# Altium PCB Rear_Tail_Lights_FULL.PcbDoc
Units mil, origin at the board's own origin, x right, y up, seen from the top; angles counter-clockwise.
Board outline 5500 x 5500 mil, 2 copper layers (Top Layer, Bottom Layer), stack 61.811 mil thick; 72 components, 63 nets, 150 pads, 406 vias.
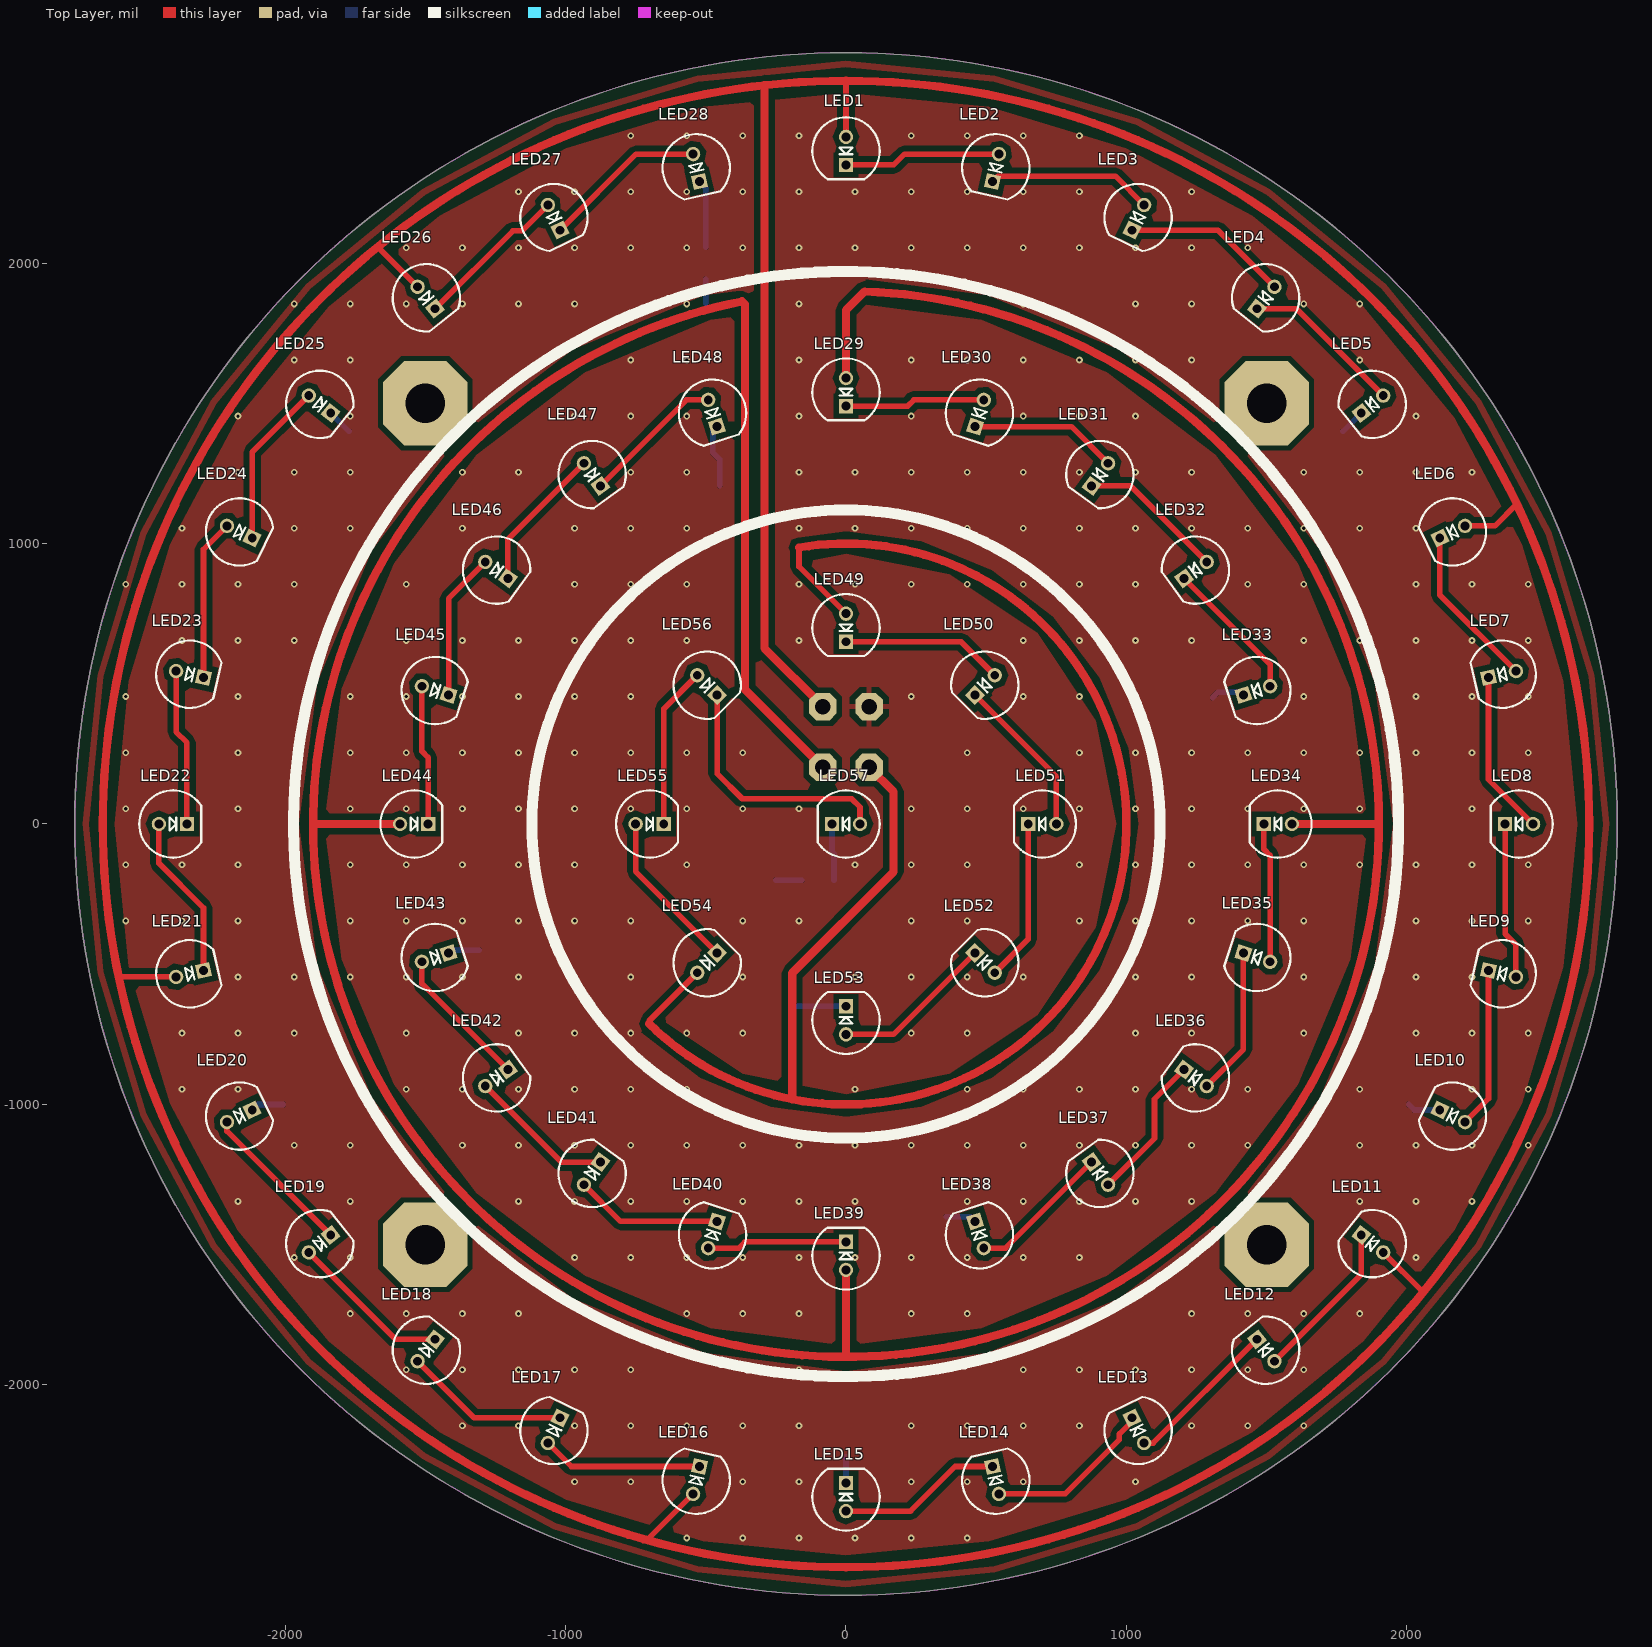
[diagram p0: Top Layer view]
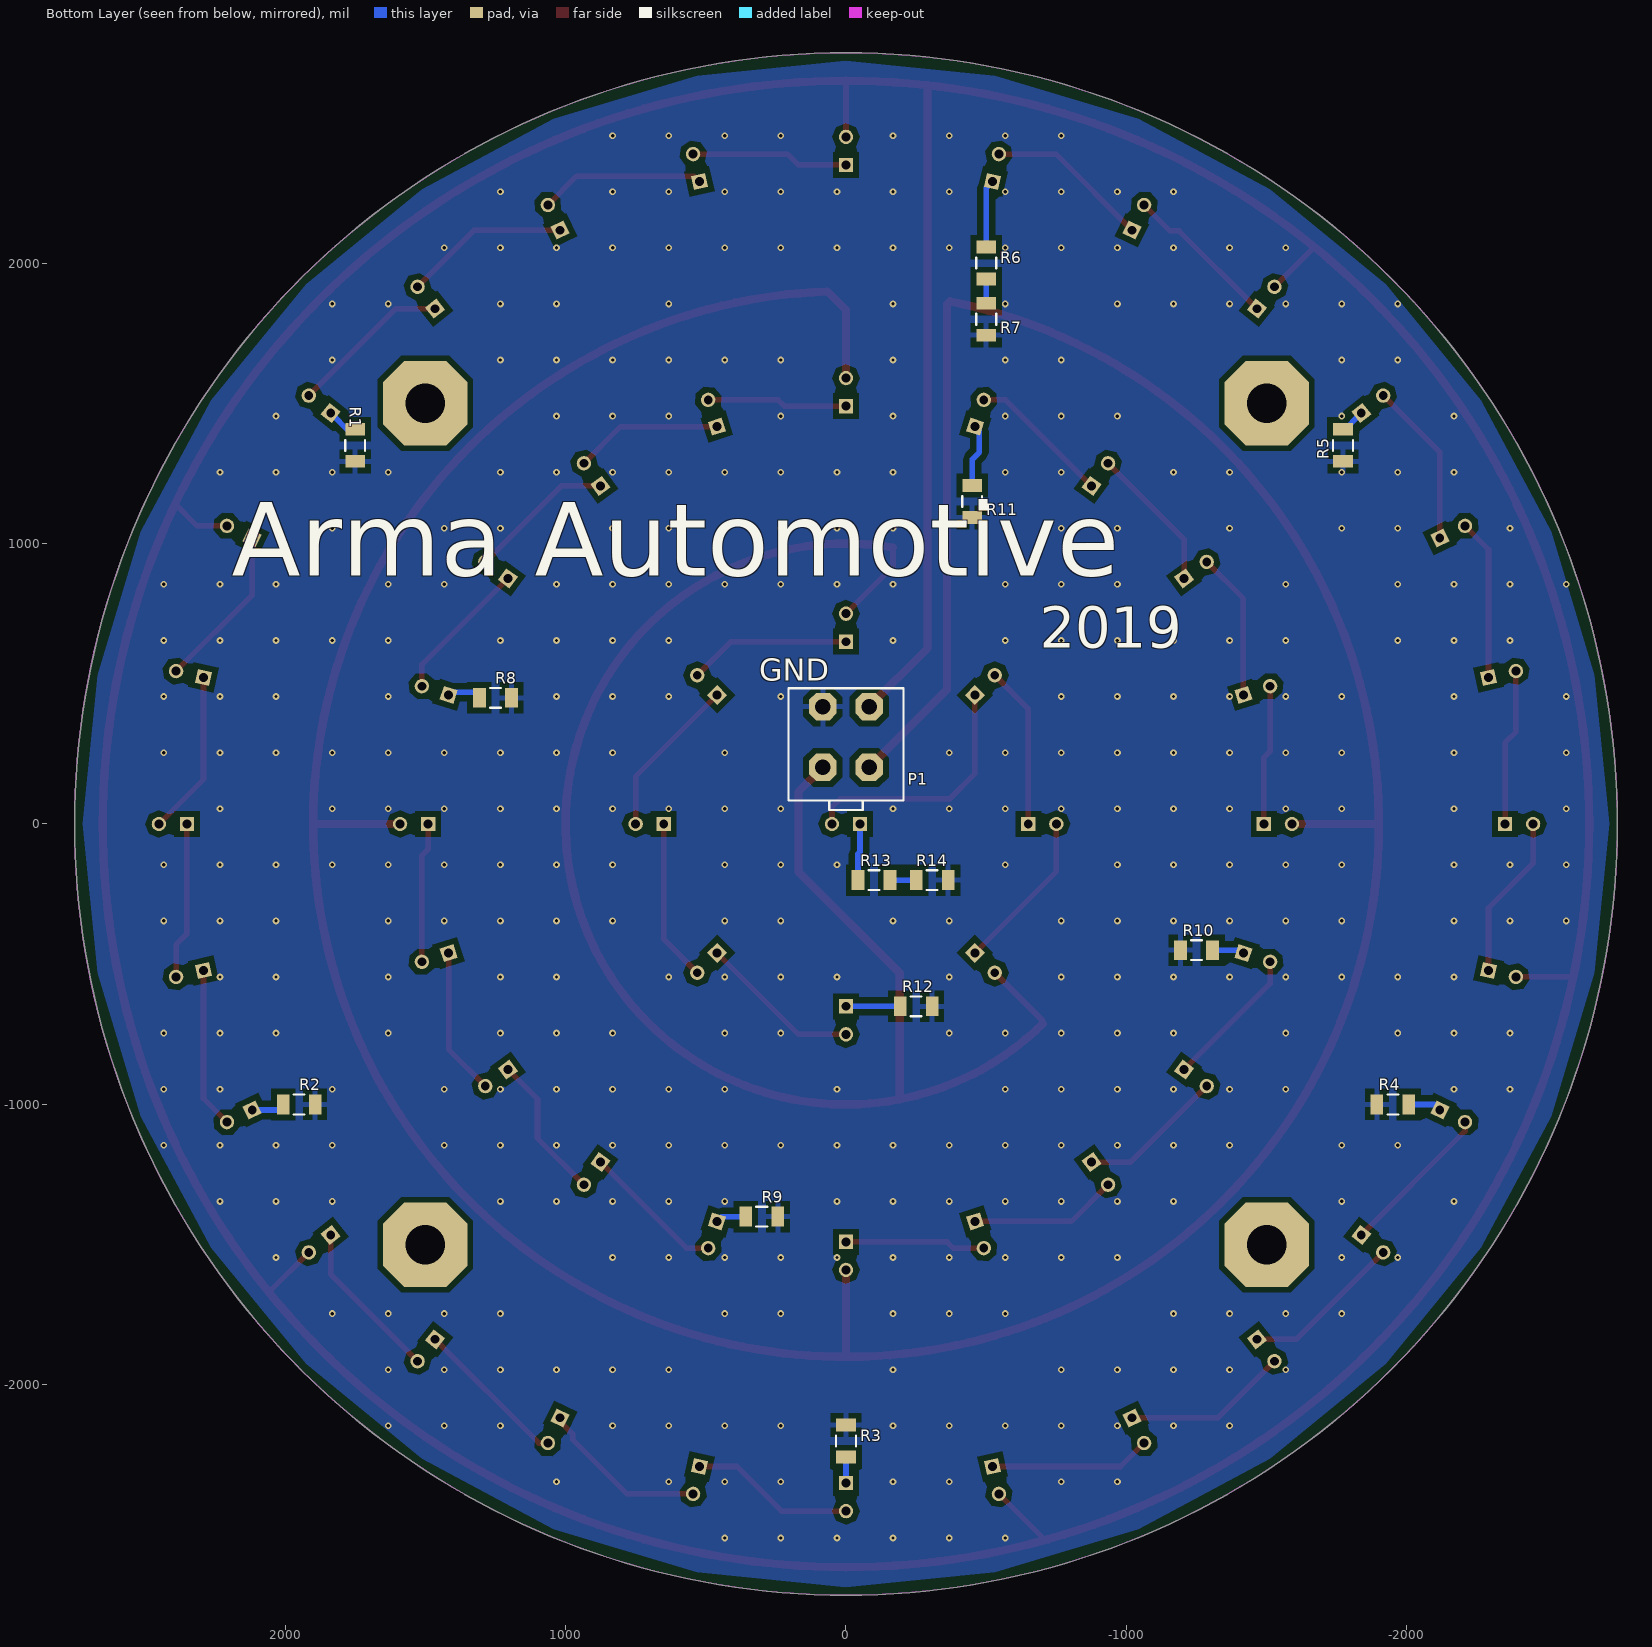
[diagram p1: Bottom Layer view, seen from below]
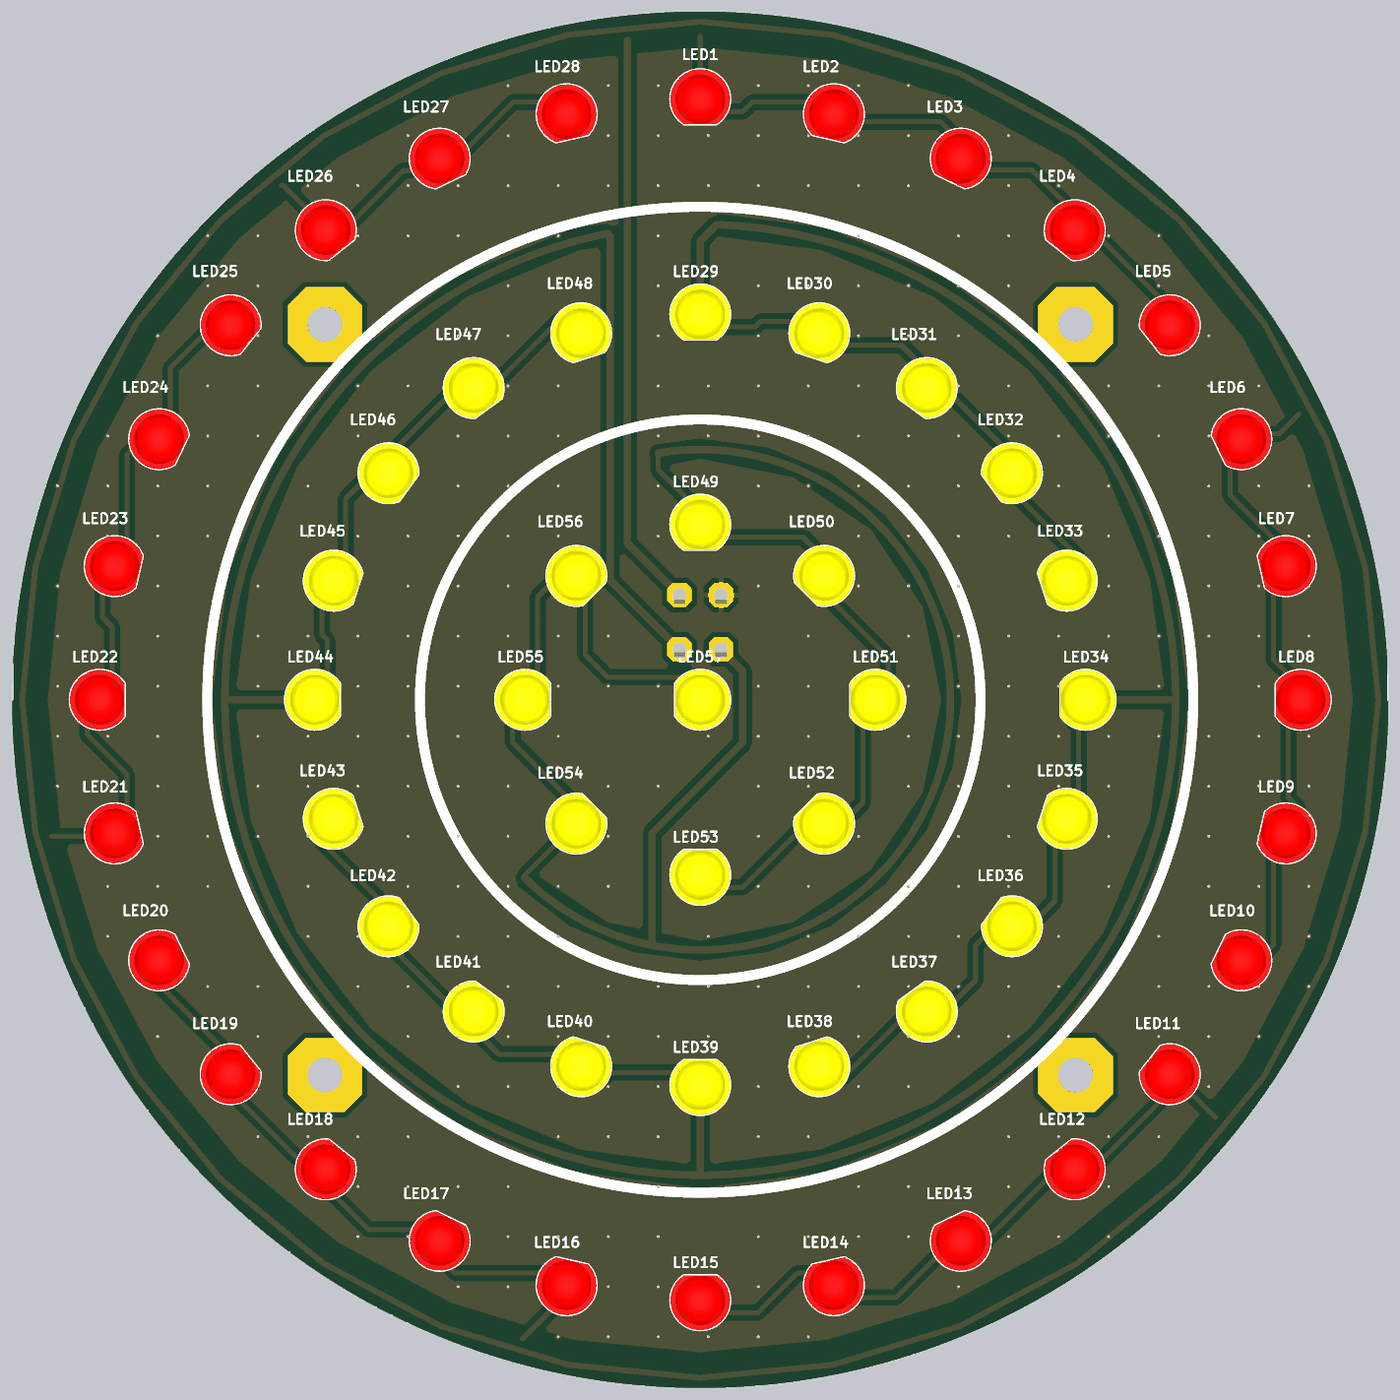
[diagram p2: 3D render of the assembled board from above, using the file's embedded part models]
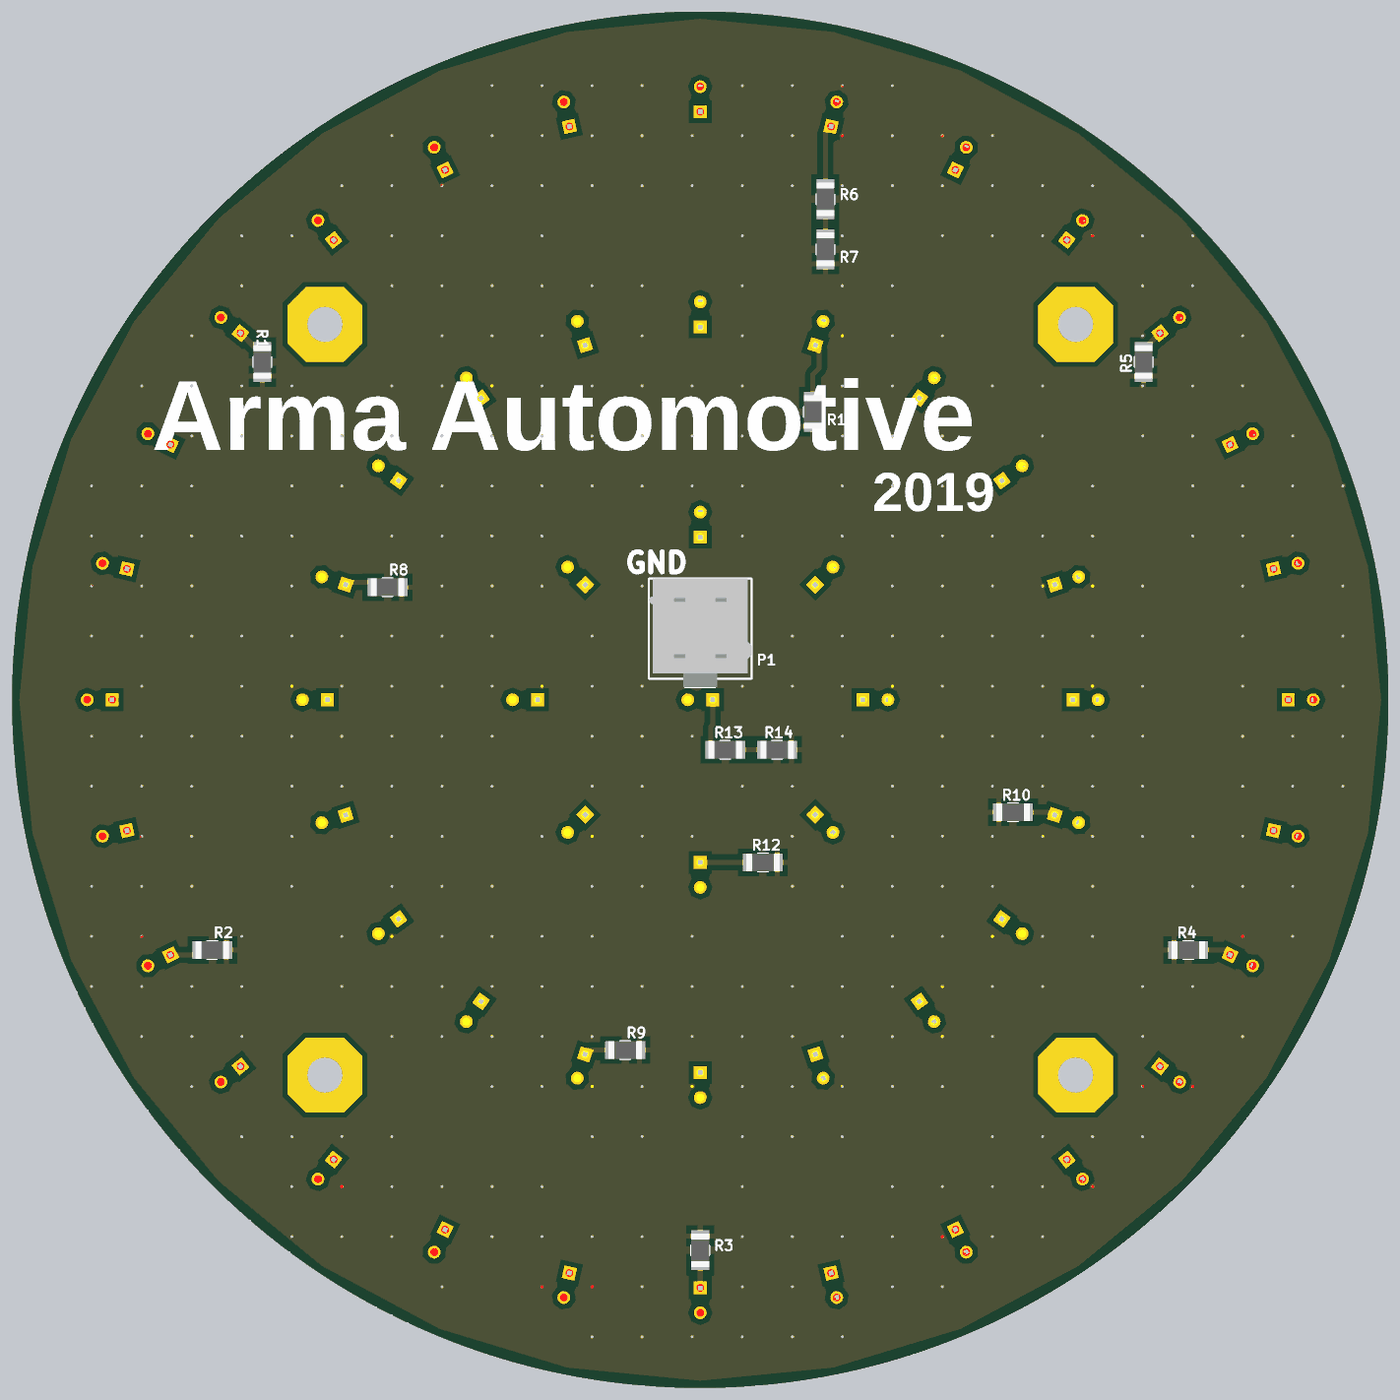
[diagram p3: 3D render of the assembled board from below, using the file's embedded part models]

## Layer stack, top to bottom
Top Solder: solder mask 0.3937, Solder Resist, Dk 3.5
Top Layer: signal copper 1.378
Dielectric 1: core 59.0551, FR-4, Dk 4.6
Bottom Layer: signal copper 1.378
Bottom Solder: solder mask 0.3937, Solder Resist, Dk 3.5

## Board outline
-2750,0 ccw(c0,0) 0,-2750 ccw(c0,0) 2750,0 ccw(c0,0) 0,2750 ccw(c0,0)

## Design rules (kind name [scope] priority, off if disabled: settings)
Clearance Clearance_AC [InNet('AC-L') or InNet('AC-N') or InNet('EARTH')] p1: gap=39.37 ignorepadtopadclearanceinfootprint=FALSE
Clearance [All] p2: gap=6 ignorepadtopadclearanceinfootprint=FALSE except(20: Arc-Poly Track-Poly SMDPad-Poly THPad-Poly Via-Poly Fill-Poly Poly-Poly)
ComponentClearance [All] p1 off: gap=10 collisioncheckmode=3 verticalgap=10 showdistances=FALSE
Height [All] p1 off: minheight=0 maxheight=1000 prefheight=500
HoleSize [All] p1 off: absolutevalues=TRUE maxlimit=196.85 minlimit=3.94 maxpercent=80.000 minpercent=20.000
HoleToHoleClearance [All] p1 off: gap=10 allowstackedmicrovias=TRUE
MinimumSolderMaskSliver [All] p1 off: minsoldermaskwidth=2
NetAntennae [All] p1 off: netantennaetolerance=0
PasteMaskExpansion [All] p1 off: expansion=0
PlaneConnect [All] p1: planeconnectstyle=Relief reliefexpansion=19.68 reliefentries=4 reliefconductorwidth=19.68 reliefairgap=19.68
PolygonConnect PolygonConnect_VIA [IsVia] p1: connectstyle=Direct reliefconductorwidth=10 reliefentries=4 polygonreliefangle="90 Angle" airgapwidth=10
PolygonConnect [All] p2: connectstyle=Relief reliefconductorwidth=19.68 reliefentries=4 polygonreliefangle="90 Angle" airgapwidth=19.68
RoutingVias [All] p1: holewidth=19.68 width=39.37 viastyle="Through Hole" minholewidth=7.87 minwidth=19.68 maxholewidth=19.68 maxwidth=39.37
SilkToBoardRegionClearance [All] p1 off:
SilkToSilkClearance [All] p1 off: silktosilkclearance=10
SilkToSolderMaskClearance SilkToViaClearance [IsVia] p1 off: minsilkscreentomaskgap=4 clearancetoexposedcopper=TRUE
SilkToSolderMaskClearance SilkscreenOverComponentPads [IsPad] p2 off: minsilkscreentomaskgap=2 clearancetoexposedcopper=TRUE
SolderMaskExpansion [All] p1: expansion=1.97
Width [All] p1: maxlimit=236.22 minlimit=5.91 preferedwidth=10
19 further rules are at their usual default settings.

## Components (designator, comment, footprint, x,y, rotation, side; value= is the part's Value field where it differs from the comment)
LED1 "RED 5mm" LED_5MM_RED_1C-2A 0,2400 r90 top
LED2 "RED 5mm" LED_5MM_RED_1C-2A 534.05,2339.83 r77.14 top
LED3 "RED 5mm" LED_5MM_RED_1C-2A 1041.32,2162.32 r64.29 top
LED4 "RED 5mm" LED_5MM_RED_1C-2A 1496.38,1876.4 r51.43 top
LED5 "RED 5mm" LED_5MM_RED_1C-2A 1876.4,1496.38 r38.57 top
LED6 "RED 5mm" LED_5MM_RED_1C-2A 2162.33,1041.32 r25.71 top
LED7 "RED 5mm" LED_5MM_RED_1C-2A 2339.83,534.05 r12.86 top
LED8 "RED 5mm" LED_5MM_RED_1C-2A 2400,0 r0 top
LED9 "RED 5mm" LED_5MM_RED_1C-2A 2339.83,-534.05 r347.14 top
LED10 "RED 5mm" LED_5MM_RED_1C-2A 2162.32,-1041.32 r334.29 top
LED11 "RED 5mm" LED_5MM_RED_1C-2A 1876.39,-1496.38 r321.43 top
LED12 "RED 5mm" LED_5MM_RED_1C-2A 1496.37,-1876.4 r308.57 top
LED13 "RED 5mm" LED_5MM_RED_1C-2A 1041.32,-2162.33 r295.71 top
LED14 "RED 5mm" LED_5MM_RED_1C-2A 534.05,-2339.83 r282.86 top
LED15 "RED 5mm" LED_5MM_RED_1C-2A 0,-2400 r270 top
LED16 "RED 5mm" LED_5MM_RED_1C-2A -534.05,-2339.83 r257.14 top
LED17 "RED 5mm" LED_5MM_RED_1C-2A -1041.32,-2162.32 r244.29 top
LED18 "RED 5mm" LED_5MM_RED_1C-2A -1496.38,-1876.39 r231.43 top
LED19 "RED 5mm" LED_5MM_RED_1C-2A -1876.4,-1496.37 r218.57 top
LED20 "RED 5mm" LED_5MM_RED_1C-2A -2162.33,-1041.32 r205.71 top
LED21 "RED 5mm" LED_5MM_RED_1C-2A -2339.83,-534.05 r192.86 top
LED22 "RED 5mm" LED_5MM_RED_1C-2A -2400,0 r180 top
LED23 "RED 5mm" LED_5MM_RED_1C-2A -2339.83,534.05 r167.14 top
LED24 "RED 5mm" LED_5MM_RED_1C-2A -2162.32,1041.32 r154.29 top
LED25 "RED 5mm" LED_5MM_RED_1C-2A -1876.39,1496.38 r141.43 top
LED26 "RED 5mm" LED_5MM_RED_1C-2A -1496.37,1876.4 r128.57 top
LED27 "RED 5mm" LED_5MM_RED_1C-2A -1041.32,2162.33 r115.71 top
LED28 "RED 5mm" LED_5MM_RED_1C-2A -534.05,2339.83 r102.86 top
LED29 "AMBER 5mm" LED_5MM_YELLOW_1C-2A 0,1540 r90 top
LED30 "AMBER 5mm" LED_5MM_YELLOW_1C-2A 475.89,1464.63 r72 top
LED31 "AMBER 5mm" LED_5MM_YELLOW_1C-2A 905.19,1245.89 r54 top
LED32 "AMBER 5mm" LED_5MM_YELLOW_1C-2A 1245.89,905.19 r36 top
LED33 "AMBER 5mm" LED_5MM_YELLOW_1C-2A 1464.63,475.89 r18 top
LED34 "AMBER 5mm" LED_5MM_YELLOW_1C-2A 1540,0 r0 top
LED35 "AMBER 5mm" LED_5MM_YELLOW_1C-2A 1464.63,-475.89 r342 top
LED36 "AMBER 5mm" LED_5MM_YELLOW_1C-2A 1245.89,-905.19 r324 top
LED37 "AMBER 5mm" LED_5MM_YELLOW_1C-2A 905.19,-1245.89 r306 top
LED38 "AMBER 5mm" LED_5MM_YELLOW_1C-2A 475.89,-1464.63 r288 top
LED39 "AMBER 5mm" LED_5MM_YELLOW_1C-2A 0,-1540 r270 top
LED40 "AMBER 5mm" LED_5MM_YELLOW_1C-2A -475.89,-1464.63 r252 top
LED41 "AMBER 5mm" LED_5MM_YELLOW_1C-2A -905.19,-1245.89 r234 top
LED42 "AMBER 5mm" LED_5MM_YELLOW_1C-2A -1245.89,-905.19 r216 top
LED43 "AMBER 5mm" LED_5MM_YELLOW_1C-2A -1464.63,-475.89 r198 top
LED44 "AMBER 5mm" LED_5MM_YELLOW_1C-2A -1540,0 r180 top
LED45 "AMBER 5mm" LED_5MM_YELLOW_1C-2A -1464.63,475.89 r162 top
LED46 "AMBER 5mm" LED_5MM_YELLOW_1C-2A -1245.89,905.19 r144 top
LED47 "AMBER 5mm" LED_5MM_YELLOW_1C-2A -905.19,1245.89 r126 top
LED48 "AMBER 5mm" LED_5MM_YELLOW_1C-2A -475.89,1464.63 r108 top
LED49 "AMBER 5mm" LED_5MM_YELLOW_1C-2A 0,700 r90 top
LED50 "AMBER 5mm" LED_5MM_YELLOW_1C-2A 494.97,494.97 r45 top
LED51 "AMBER 5mm" LED_5MM_YELLOW_1C-2A 700,0 r0 top
LED52 "AMBER 5mm" LED_5MM_YELLOW_1C-2A 494.97,-494.97 r315 top
LED53 "AMBER 5mm" LED_5MM_YELLOW_1C-2A 0,-700 r270 top
LED54 "AMBER 5mm" LED_5MM_YELLOW_1C-2A -494.97,-494.97 r225 top
LED55 "AMBER 5mm" LED_5MM_YELLOW_1C-2A -700,0 r180 top
LED56 "AMBER 5mm" LED_5MM_YELLOW_1C-2A -494.97,494.97 r135 top
LED57 "AMBER 5mm" LED_5MM_YELLOW_1C-2A 0,0 r0 top
P1 "0039281043" 0039281043 0,300 r180 bottom
R1 "220R / 1206" RESC3216X70N 1750,1350 r270 bottom
R2 "220R / 1206" RESC3216X70N 1950,-1000 r180 bottom
R3 "220R / 1206" RESC3216X70N 0,-2200 r90 bottom
R4 "220R / 1206" RESC3216X70N -1950,-1000 r0 bottom
R5 "220R / 1206" RESC3216X70N -1772.1,1350 r270 bottom
R6 "200R / 1206" RESC3216X70N -500,2000 r270 bottom
R7 "220R / 1206" RESC3216X70N -500,1800 r270 bottom
R8 "220R / 1206" RESC3216X70N 1250,450 r180 bottom
R9 "220R / 1206" RESC3216X70N 300,-1400 r180 bottom
R10 "220R / 1206" RESC3216X70N -1250,-450 r0 bottom
R11 "220R / 1206" RESC3216X70N -450,1150 r270 bottom
R12 "220R / 1206" RESC3216X70N -250,-650 r180 bottom
R13 "100R / 1206" RESC3216X70N -100,-200 r180 bottom
R14 "220R / 1206" RESC3216X70N -307.09,-200 r180 bottom

## Footprints (in the part's own frame and the unit in brackets; to place one, negate y for a bottom-side part, rotate by r counter-clockwise, add the part's x,y. Pads: shape width x height; smd on the part's side, far side on the other; paste and mask are expansions set on the pad)
0039281043 [mm] "Connector Header Through Hole 4 position 0.165\" (4.20mm)"
  oct 2.5x2.5 hole 1.4: 1(-2.1,3.004) 2(2.1,3.004) 3(-2.1,-2.496) 4(2.1,-2.496)
  silkscreen extent -5.21,-6.35 5.21,4.67, body extent -5.2,-6.33 5.2,4.67, height 12.8
LED_5MM_RED_1C-2A [mm] "LED, Red, Body Dia. 5.08mm, Pin spacing 2.54mm"
  rect 1.3x1.3 hole 0.8: 1(-1.27,0)
  round 1.3 hole 0.8: 2(1.27,0)
  silkscreen extent -2.56,-3.05 3.05,3.05, body extent -2.54,-3.05 3.05,3.05, height 14.32
LED_5MM_YELLOW_1C-2A [mm] "LED, Yellow, Body Dia. 5.08mm, Pin spacing 2.54mm"
  rect 1.3x1.3 hole 0.8: 1(-1.27,0)
  round 1.3 hole 0.8: 2(1.27,0)
  silkscreen extent -2.56,-3.05 3.05,3.05, body extent -2.54,-3.05 3.05,3.05, height 14.32
RESC3216X70N [mm] "Chip Resistor, EIA 1206, Metric 3216, Body 3.2x1.6mm, IPC Medium Density"
  rect 1.15x1.8 smd: 1(-1.45,0) 2(1.45,0)
  silkscreen extent -0.5,-0.9 0.5,0.9, body extent -1.7,-0.9 1.7,0.9, height 0.7

## Part data
LED1 LED2 LED3 LED4 LED5 LED6 LED7 LED8 LED9 LED10 LED11 LED12 LED13 LED14 LED15 LED16 LED17 LED18 LED19 LED20 LED21 LED22 LED23 LED24 LED25 LED26 LED27 LED28 LED29 LED30 LED31 LED32 LED33 LED34 LED35 LED36 LED37 LED38 LED39 LED40 LED41 LED42 LED43 LED44 LED45 LED46 LED47 LED48 LED49 LED50 LED51 LED52 LED53 LED54 LED55 LED56 LED57: library part LED0, "LED GREEN CLEAR 0603 SMD", Manufacturer="Lite-On Inc.", Manufacturer PN=LTST-C191KRKT, PackageDescription="LED; 2 Leads", PackageReference=LED-0, Published=8-Jun-2000, Publisher="Altium Limited"
P1: library part "Header 2X2", "Header, 2-Pin, Dual row", LatestRevisionDate=17-Jul-2002, LatestRevisionNote="Re-released for DXP Platform.", Publisher="Altium Limited"
R1 R2 R3 R4 R5 R6 R7 R8 R9 R10 R11 R12 R13 R14: library part R_EU, "Resistor", LatestRevisionDate="27-Jul-20  -  Semtech"

## Free pads (board coordinates)
  oct 300x300 hole 140 mask+0: 0(-1500,-1500) 0(-1500,1500) 0(1500,-1500) 0(1500,1500)

## Via types
v1: diameter 24, hole 12, Top Layer to Bottom Layer, tented both sides, 406 vias

## Nets (pads, with @x,y where several pads share a name; then routed paths per layer and width w, separated by ;. In a path a pad name is that pad's centre, name@x,y a point inside that pad or via, vN(x,y) a via of type N, cw(c..) or ccw(c..) an arc to the next point about the centre after c; other vN are vias at no path point)
GND: P1.1 R1.2 R2.2 R3.2 R4.2 R5.2 R7.2 R8.2 R9.2 R10.2 R11.2 R12.2 R14.2
  other v1: -567.74,-2545.62 -367.74,-2545.62 -167.74,-2545.62 32.26,-2545.62 232.26,-2545.62 432.26,-2545.62 -967.74,-2345.62 -767.74,-2345.62 -367.74,-2345.62 -167.74,-2345.62 232.26,-2345.62 432.26,-2345.62 632.26,-2345.62 1032.26,-2345.62 -1367.74,-2145.62 -1167.74,-2145.62 -967.74,-2145.62 -767.74,-2145.62 -567.74,-2145.62 -367.74,-2145.62 -167.74,-2145.62 232.26,-2145.62 432.26,-2145.62 632.26,-2145.62 832.26,-2145.62 1232.26,-2145.62 1432.26,-2145.62 1632.26,-2145.62 -1567.74,-1945.62 -1367.74,-1945.62 -1167.74,-1945.62 -967.74,-1945.62 -767.74,-1945.62 -167.74,-1945.62 632.26,-1945.62 832.26,-1945.62 1032.26,-1945.62 1232.26,-1945.62 1432.26,-1945.62 1632.26,-1945.62 -1767.74,-1745.62 -1567.74,-1745.62 -1367.74,-1745.62 -1167.74,-1745.62 -567.74,-1745.62 -367.74,-1745.62 -167.74,-1745.62 232.26,-1745.62 432.26,-1745.62 1232.26,-1745.62 1432.26,-1745.62 1632.26,-1745.62 1832.26,-1745.62 -1967.74,-1545.62 -1767.74,-1545.62 -967.74,-1545.62 -767.74,-1545.62 -567.74,-1545.62 -367.74,-1545.62 -167.74,-1545.62 32.26,-1545.62 232.26,-1545.62 432.26,-1545.62 632.26,-1545.62 832.26,-1545.62 2032.26,-1545.62 -2167.74,-1345.62 -1767.74,-1345.62 -1167.74,-1345.62 -967.74,-1345.62 -767.74,-1345.62 -567.74,-1345.62 -367.74,-1345.62 -167.74,-1345.62 32.26,-1345.62 432.26,-1345.62 632.26,-1345.62 832.26,-1345.62 1032.26,-1345.62 1232.26,-1345.62 1832.26,-1345.62 2032.26,-1345.62 2232.26,-1345.62 -1967.74,-1145.62 -1767.74,-1145.62 -1367.74,-1145.62 -1167.74,-1145.62 -967.74,-1145.62 -767.74,-1145.62 -567.74,-1145.62 -367.74,-1145.62 -167.74,-1145.62 32.26,-1145.62 232.26,-1145.62 432.26,-1145.62 632.26,-1145.62 832.26,-1145.62 1032.26,-1145.62 1232.26,-1145.62 1432.26,-1145.62 1832.26,-1145.62 2032.26,-1145.62 2232.26,-1145.62 2432.26,-1145.62 -2367.74,-945.62 -2167.74,-945.62 -1567.74,-945.62 -1367.74,-945.62 -1167.74,-945.62 -967.74,-945.62 -767.74,-945.62 -567.74,-945.62 32.26,-945.62 432.26,-945.62 632.26,-945.62 832.26,-945.62 1032.26,-945.62 1232.26,-945.62 1432.26,-945.62 1832.26,-945.62 2232.26,-945.62 2432.26,-945.62 -2367.74,-745.62 -2167.74,-745.62 -1967.74,-745.62 -1567.74,-745.62 -1167.74,-745.62 -967.74,-745.62 -767.74,-745.62 -567.74,-745.62 -367.74,-745.62 232.26,-745.62 432.26,-745.62 832.26,-745.62 1032.26,-745.62 1232.26,-745.62 1632.26,-745.62 2032.26,-745.62 2232.26,-745.62 2432.26,-745.62 -2167.74,-545.62 -1967.74,-545.62 -1767.74,-545.62 -1567.74,-545.62 -1367.74,-545.62 -1167.74,-545.62 -967.74,-545.62 -767.74,-545.62 -367.74,-545.62 32.26,-545.62 232.26,-545.62 432.26,-545.62 632.26,-545.62 1032.26,-545.62 1232.26,-545.62 1632.26,-545.62 2032.26,-545.62 2232.26,-545.62 -2567.74,-345.62 -2367.74,-345.62 -2167.74,-345.62 -1767.74,-345.62 -1567.74,-345.62 -1367.74,-345.62 -1167.74,-345.62 -967.74,-345.62 -767.74,-345.62 -367.74,-345.62 -167.74,-345.62 232.26,-345.62 432.26,-345.62 832.26,-345.62 1032.26,-345.62 1232.26,-345.62 1432.26,-345.62 1632.26,-345.62 2032.26,-345.62 2232.26,-345.62 2432.26,-345.62 -2567.74,-145.62 -2367.74,-145.62 -2167.74,-145.62 -1767.74,-145.62 -1567.74,-145.62 -1367.74,-145.62 -1167.74,-145.62 -967.74,-145.62 -567.74,-145.62 32.26,-145.62 232.26,-145.62 432.26,-145.62 832.26,-145.62 1032.26,-145.62 1232.26,-145.62 1432.26,-145.62 1632.26,-145.62 1832.26,-145.62 2032.26,-145.62 2232.26,-145.62 2432.26,-145.62 -2567.74,54.38 -2167.74,54.38 -1767.74,54.38 -1567.74,54.38 -1367.74,54.38 -1167.74,54.38 -967.74,54.38 -767.74,54.38 -567.74,54.38 -367.74,54.38 -167.74,54.38 232.26,54.38 432.26,54.38 632.26,54.38 832.26,54.38 1032.26,54.38 1232.26,54.38 1432.26,54.38 1632.26,54.38 1832.26,54.38 2232.26,54.38 -2567.74,254.38 -2167.74,254.38 -1767.74,254.38 -1567.74,254.38 -1367.74,254.38 -1167.74,254.38 -967.74,254.38 -767.74,254.38 -567.74,254.38 -367.74,254.38 432.26,254.38 832.26,254.38 1032.26,254.38 1232.26,254.38 1432.26,254.38 1632.26,254.38 1832.26,254.38 2032.26,254.38 2232.26,254.38 2432.26,254.38 -2567.74,454.38 -2167.74,454.38 -1767.74,454.38 -1567.74,454.38 -1367.74,454.38 -1167.74,454.38 -967.74,454.38 -767.74,454.38 232.26,454.38 632.26,454.38 832.26,454.38 1032.26,454.38 1632.26,454.38 2032.26,454.38 2232.26,454.38 2432.26,454.38 -2367.74,654.38 -2167.74,654.38 -1967.74,654.38 -1567.74,654.38 -1367.74,654.38 -1167.74,654.38 -967.74,654.38 -767.74,654.38 -567.74,654.38 -167.74,654.38 632.26,654.38 832.26,654.38 1032.26,654.38 1232.26,654.38 1632.26,654.38 1832.26,654.38 2032.26,654.38 2232.26,654.38 2432.26,654.38 -2567.74,854.38 -2367.74,854.38 -2167.74,854.38 -1967.74,854.38 -1567.74,854.38 -967.74,854.38 -767.74,854.38 -567.74,854.38 -167.74,854.38 32.26,854.38 232.26,854.38 432.26,854.38 632.26,854.38 832.26,854.38 1032.26,854.38 1432.26,854.38 1632.26,854.38 2032.26,854.38 2232.26,854.38 2432.26,854.38 -2367.74,1054.38 -1967.74,1054.38 -1767.74,1054.38 -1367.74,1054.38 -967.74,1054.38 -767.74,1054.38 -567.74,1054.38 -167.74,1054.38 32.26,1054.38 232.26,1054.38 432.26,1054.38 632.26,1054.38 832.26,1054.38 1032.26,1054.38 1232.26,1054.38 1432.26,1054.38 1632.26,1054.38 1832.26,1054.38 2032.26,1054.38 -2167.74,1254.38 -1967.74,1254.38 -1767.74,1254.38 -1367.74,1254.38 -1167.74,1254.38 -767.74,1254.38 -567.74,1254.38 -167.74,1254.38 32.26,1254.38 232.26,1254.38 432.26,1254.38 632.26,1254.38 832.26,1254.38 1032.26,1254.38 1232.26,1254.38 1632.26,1254.38 1832.26,1254.38 2032.26,1254.38 2232.26,1254.38 -2167.74,1454.38 -1767.74,1454.38 -967.74,1454.38 -767.74,1454.38 -567.74,1454.38 -167.74,1454.38 232.26,1454.38 632.26,1454.38 832.26,1454.38 1032.26,1454.38 2032.26,1454.38 -1967.74,1654.38 -1767.74,1654.38 -767.74,1654.38 -567.74,1654.38 -167.74,1654.38 232.26,1654.38 432.26,1654.38 632.26,1654.38 832.26,1654.38 1032.26,1654.38 1232.26,1654.38 1832.26,1654.38 -1967.74,1854.38 -1767.74,1854.38 -1567.74,1854.38 -1367.74,1854.38 -1167.74,1854.38 -967.74,1854.38 -567.74,1854.38 -167.74,1854.38 632.26,1854.38 1032.26,1854.38 1232.26,1854.38 1632.26,1854.38 1832.26,1854.38 -1567.74,2054.38 -1367.74,2054.38 -1167.74,2054.38 -967.74,2054.38 -767.74,2054.38 -567.74,2054.38 -367.74,2054.38 -167.74,2054.38 32.26,2054.38 232.26,2054.38 432.26,2054.38 632.26,2054.38 832.26,2054.38 1032.26,2054.38 1232.26,2054.38 1432.26,2054.38 -1167.74,2254.38 -967.74,2254.38 -767.74,2254.38 -567.74,2254.38 -367.74,2254.38 -167.74,2254.38 32.26,2254.38 232.26,2254.38 432.26,2254.38 632.26,2254.38 832.26,2254.38 1232.26,2254.38 -767.74,2454.38 -567.74,2454.38 -367.74,2454.38 -167.74,2454.38 232.26,2454.38 432.26,2454.38 632.26,2454.38 832.26,2454.38
NetLED1_1: LED1.1 LED2.2 | length 561.2
  Top Layer w20: LED1.1 170,2350 208.57,2388.57 LED2.2
NetLED2_1: LED2.1 LED3.2 | length 590.4
  Top Layer w20: LED2.1 541.84,2310 960.39,2310 LED3.2
NetLED3_1: LED3.1 LED4.2 | length 591.5
  Top Layer w20: LED3.1 1325.76,2117.28 LED4.2
NetLED4_1: LED4.1 LED5.2 | length 578.6
  Top Layer w20: LED4.1 1605.73,1837.3 LED5.2
NetLED5_1: LED5.1 R1.1 | length 92.2
  Bottom Layer w20: R1.1@1772.1,1400 LED5.1
NetLED6_1: LED6.1 LED7.2 | length 586.8
  Top Layer w20: LED6.1 2117.28,816.47 LED7.2
NetLED7_1: LED7.1 LED8.2 | length 588.8
  Top Layer w20: LED7.1 2291.08,158.92 LED8.2
NetLED8_1: LED8.1 LED9.2 | length 561.2
  Top Layer w20: LED8.1 2350,-391.43 2388.57,-430 LED9.2
NetLED9_1: LED9.1 LED10.2 | length 574.8
  Top Layer w20: LED10.2 2291.08,-979.31 LED9.1
NetLED10_1: LED10.1 R2.1 | length 118.3
  Bottom Layer w20: R2.1 2026.72,-1019.63 LED10.1
NetLED11_1: LED11.1 LED12.2 | length 578.6
  Top Layer w20: LED12.2 1837.3,-1605.73 LED11.1
NetLED12_1: LED12.1 LED13.2 | length 555.5
  Top Layer w20: LED13.2 1095.13,-2207.37 LED12.1
NetLED13_1: LED13.1 LED14.2 | length 606.2
  Top Layer w20: LED14.2 781.43,-2388.57 975,-2195 975,-2175 1019.62,-2130.38 LED13.1
NetLED14_1: LED14.1 LED15.2 | length 588.8
  Top Layer w20: LED15.2 230,-2450 388.92,-2291.08 LED14.1
NetLED15_1: LED15.1 R3.1 | length 92.9
  Bottom Layer w20: LED15.1 R3.1
NetLED16_1: LED16.1 LED17.2 | length 574.8
  Top Layer w20: LED17.2 -979.31,-2291.08 LED16.1
NetLED17_1: LED17.1 LED18.2 | length 591.5
  Top Layer w20: LED18.2 -1325.76,-2117.28 LED17.1
NetLED18_1: LED18.1 LED19.2 | length 578.6
  Top Layer w20: LED19.2 -1605.73,-1837.3 LED18.1
NetLED19_1: LED19.1 LED20.2 | length 555.5
  Top Layer w20: LED20.2 -2207.37,-1095.13 LED19.1
NetLED20_1: LED20.1 R4.1 | length 118.3
  Bottom Layer w20: LED20.1 -2097.65,-1000 R4.1
NetLED21_1: LED21.1 LED22.2 | length 588.8
  Top Layer w20: LED22.2 -2450,-140 -2291.08,-298.92 LED21.1
NetLED22_1: LED22.1 LED23.2 | length 561.2
  Top Layer w20: LED23.2 -2388.57,328.57 -2350,290 LED22.1
NetLED23_1: LED23.1 LED24.2 | length 574.8
  Top Layer w20: LED23.1 -2291.08,979.31 LED24.2
NetLED24_1: LED24.1 LED25.2 | length 591.5
  Top Layer w20: LED24.1 -2117.28,1325.76 LED25.2
NetLED25_1: LED25.1 R5.1 | length 92.2
  Bottom Layer w20: LED25.1 R5.1@-1772.1,1400
NetLED26_1: LED26.1 LED27.2 | length 555.5
  Top Layer w20: LED26.1 -1187.71,2114.8 -1155.59,2114.8 LED27.2
NetLED27_1: LED27.1 LED28.2 | length 586.8
  Top Layer w20: LED27.1 -748.33,2388.57 LED28.2
NetLED28_1: LED28.1 R6.1 | length 243.5
  Bottom Layer w20: LED28.1 -500,2268.16 R6.1
NetLED29_1: LED29.1 LED30.2 | length 500.5
  Top Layer w20: LED29.1 220,1490 242.18,1512.18 LED30.2
NetLED30_1: LED30.1 LED31.2 | length 528.3
  Top Layer w20: LED30.1 803.84,1417.07 LED31.2
NetLED31_1: LED31.1 LED32.2 | length 522.7
  Top Layer w20: LED31.1 1015.48,1205.44 LED32.2
NetLED32_1: LED32.1 LED33.2 | length 511.5
  Top Layer w20: LED32.1 1512.18,569.06 LED33.2
NetLED33_1: LED33.1 R8.1 | length 122.2
  Bottom Layer w20: R8.1 1327.09,470 1407.51,470 LED33.1
NetLED34_1: LED34.1 LED35.2 | length 500.5
  Top Layer w20: LED34.1 1490,-90 1512.18,-112.18 LED35.2
NetLED35_1: LED35.1 LED36.2 | length 528.3
  Top Layer w20: LED36.2 1417.07,-803.84 LED35.1
NetLED36_1: LED36.1 LED37.2 | length 522.7
  Top Layer w20: LED37.2 1100,-1120.92 1100,-981.24 LED36.1
NetLED37_1: LED37.1 LED38.2 | length 511.5
  Top Layer w20: LED38.2 569.06,-1512.18 LED37.1
NetLED38_1: LED38.1 R9.1 | length 110.4
  Bottom Layer w20: R9.1 443.36,-1400 LED38.1
NetLED39_1: LED39.1 LED40.2 | length 500.5
  Top Layer w20: LED40.2 -382.18,-1512.18 -360,-1490 LED39.1
NetLED40_1: LED40.1 LED41.2 | length 528.3
  Top Layer w20: LED41.2 -803.84,-1417.07 LED40.1
NetLED41_1: LED41.1 LED42.2 | length 522.7
  Top Layer w20: LED42.2 -1015.48,-1205.44 LED41.1
NetLED42_1: LED42.1 LED43.2 | length 511.5
  Top Layer w20: LED43.2 -1512.18,-569.06 LED42.1
NetLED43_1: LED43.1 R10.1 | length 114.3
  Bottom Layer w20: LED43.1 -1406.64,-450 R10.1
NetLED44_1: LED44.1 LED45.2 | length 500.5
  Top Layer w20: LED45.2 -1512.18,259.45 -1490,237.27 LED44.1
NetLED45_1: LED45.1 LED46.2 | length 528.3
  Top Layer w20: LED45.1 -1417.07,803.84 LED46.2
NetLED46_1: LED46.1 LED47.2 | length 522.7
  Top Layer w20: LED46.1 -1205.44,1015.48 LED47.2
NetLED47_1: LED47.1 LED48.2 | length 511.5
  Top Layer w20: LED47.1 -569.06,1512.18 LED48.2
NetLED48_1: LED48.1 R11.1 | length 226.9
  Bottom Layer w20: LED48.1 -475.65,1401.86 -475.65,1325.65 -450,1300 R11.1
NetLED49_1: LED49.1 LED50.2 | length 579.9
  Top Layer w20: LED49.1 410.66,650 LED50.2
NetLED50_1: LED50.1 LED51.2 | length 579.9
  Top Layer w20: LED50.1 750,169.24 LED51.2
NetLED51_1: LED51.1 LED52.2 | length 579.9
  Top Layer w20: LED52.2 650,-410.66 LED51.1
NetLED52_1: LED52.1 LED53.2 | length 579.9
  Top Layer w20: LED53.2 169.24,-750 LED52.1
NetLED53_1: LED53.1 R12.1 | length 192.9
  Bottom Layer w20: R12.1 LED53.1
NetLED54_1: LED54.1 LED55.2 | length 579.9
  Top Layer w20: LED55.2 -750,-169.24 LED54.1
NetLED55_1: LED55.1 LED56.2 | length 579.9
  Top Layer w20: LED55.1 -650,410.66 LED56.2
NetLED56_1: LED56.1 LED57.2 | length 899.2
  Top Layer w20: LED56.1 -459.62,179.62 -370,90 20,90 50,60 LED57.2
NetLED57_1: LED57.1 R13.1 | length 202.9
  Bottom Layer w20: LED57.1 -50,-100 -42.91,-107.09 R13.1
NetR6_2: R6.2 R7.1 | length 85.8
  Bottom Layer w20: R7.1 R6.2
NetR13_2: R13.2 R14.1 | length 92.9
  Bottom Layer w20: R14.1 R13.2
VCC1: LED1.2 LED6.2 LED11.2 LED16.2 LED21.2 LED26.2 P1.2 | length 20212.9
  Top Layer w20: -2593.17,-545.85 -2592.5,-545.17 LED21.2 ; -1673.71,2054.55 -1666.61,2054.55 LED26.2 ; -710.81,-2552.89 -709.5,-2552.89 LED16.2 ; LED1.2 0,2650 ; LED11.2 2056.75,-1668.81 2058.54,-1668.81 ; LED6.2 2313.98,1063.01 2391.84,1140.88
  Top Layer w30: -290.44,2634.03 -290.44,626.03 P1.2 ; 2650,0 ccw(c0,0) 2650,0
VCC2: LED29.2 LED34.2 LED39.2 LED44.2 P1.4 | length 14545.8
  Top Layer w30: -1900,0 LED44.2 ; P1.4 -360,479.05 -360,1852.66 -370.8,1863.47 ccw(c0,0) 66.47,1898.84 0,1832.37 LED29.2 ; 0,-1900 LED39.2 ; LED34.2 1900,0
VCC3: LED49.2 LED54.2 P1.3 | length 6014.7
  Top Layer w20: -701.52,-712.65 -701.52,-701.52 LED54.2 ; -167.59,985.86 -167.59,917.59 LED49.2
  Top Layer w30: -701.52,-712.65 ccw(c0,0) -167.59,985.86 ; -192.22,-981.35 -192.22,-532.22 169.24,-170.76 169.24,115.17 P1.3

## Polygon pours and split planes (outlines as drawn)
GND on Bottom Layer "GND_L02_P004" (solid, remove dead copper, pour order 4): -2750,2750 -2750,-2750 2750,-2750 2750,2750
GND on Top Layer "GND_L01_P006" (solid, remove dead copper, pour order 6): -2750,2750 -2750,-2750 2750,-2750 2750,2750

## Keep-outs
Keep-Out Layer:
  circle w3.94: c0,0 r2750

## Silkscreen, mask and mechanical layers (free items; w line width, h text height)
Top Overlay:
  circle w40: c0,0 r1970
  circle w40: c0,0 r1120
Bottom Overlay:
  text "Arma Automotive" at 2190,800 h450
  text "2019" at -690,580 h250
  text "GND" at 310,510 h80

## Dimensions
-2750,0 to 2750,0 on Top Overlay